# Altium PCB PCB_gen.PcbDoc
Units mm, origin at the board's own origin, x right, y up, seen from the top; angles counter-clockwise.
Board outline 28.17 x 51.31 mm, 2 copper layers (Top Layer, Bottom Layer); 23 components, 24 nets, 92 pads, 1 vias.
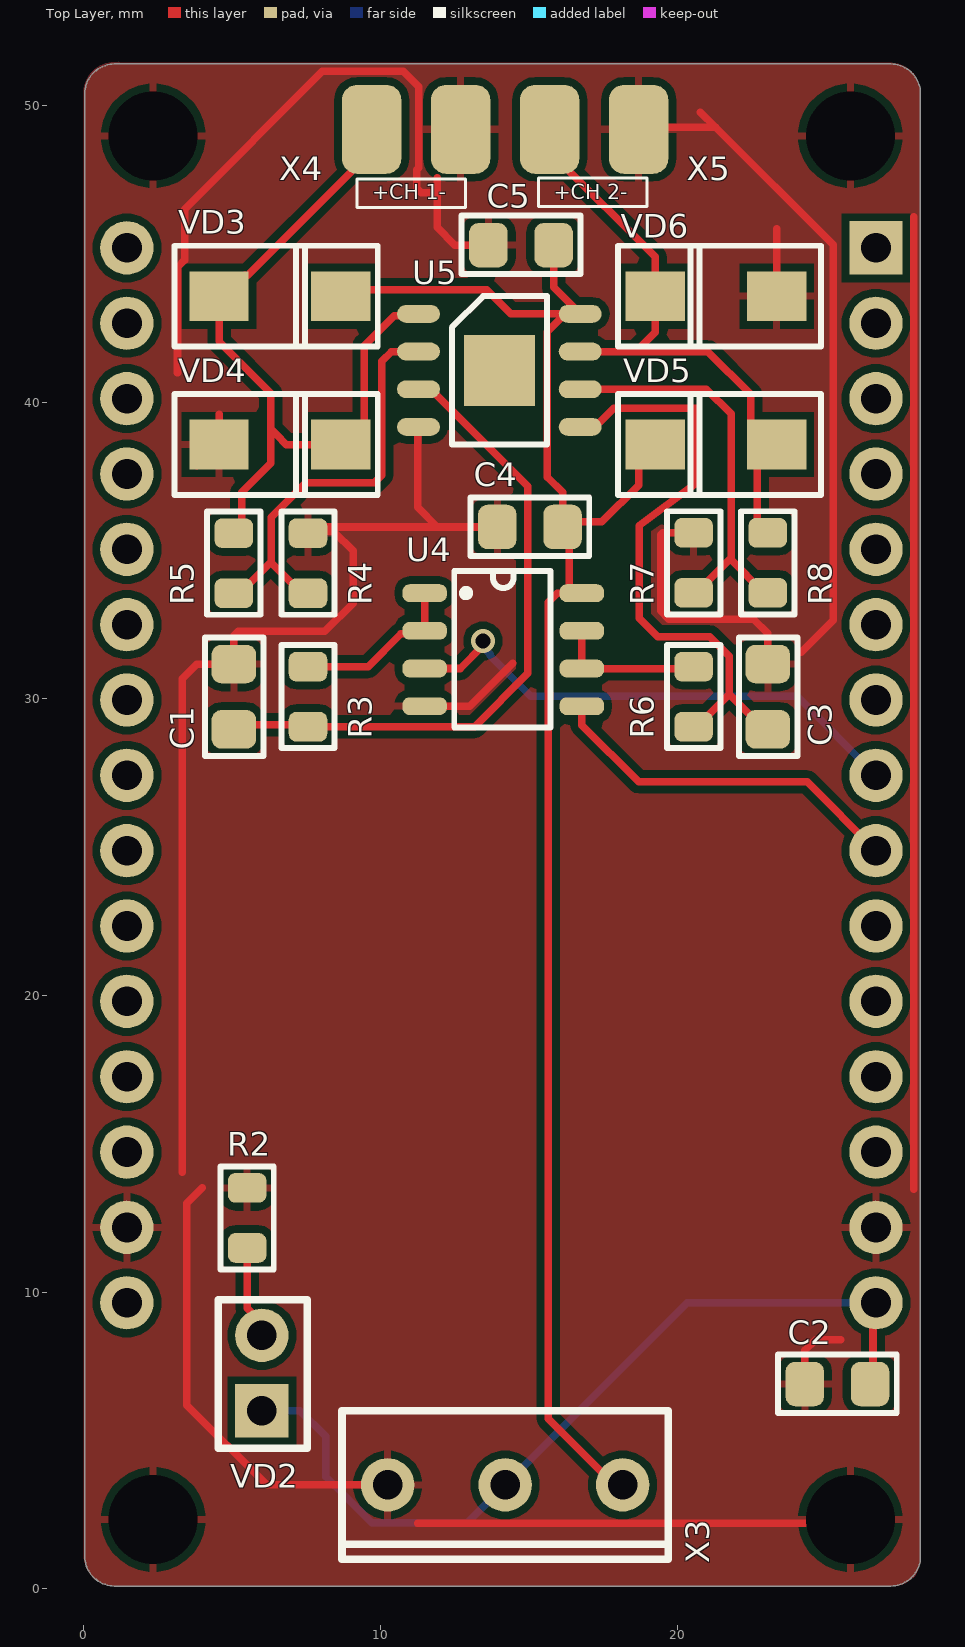
[diagram p0: Top Layer view]
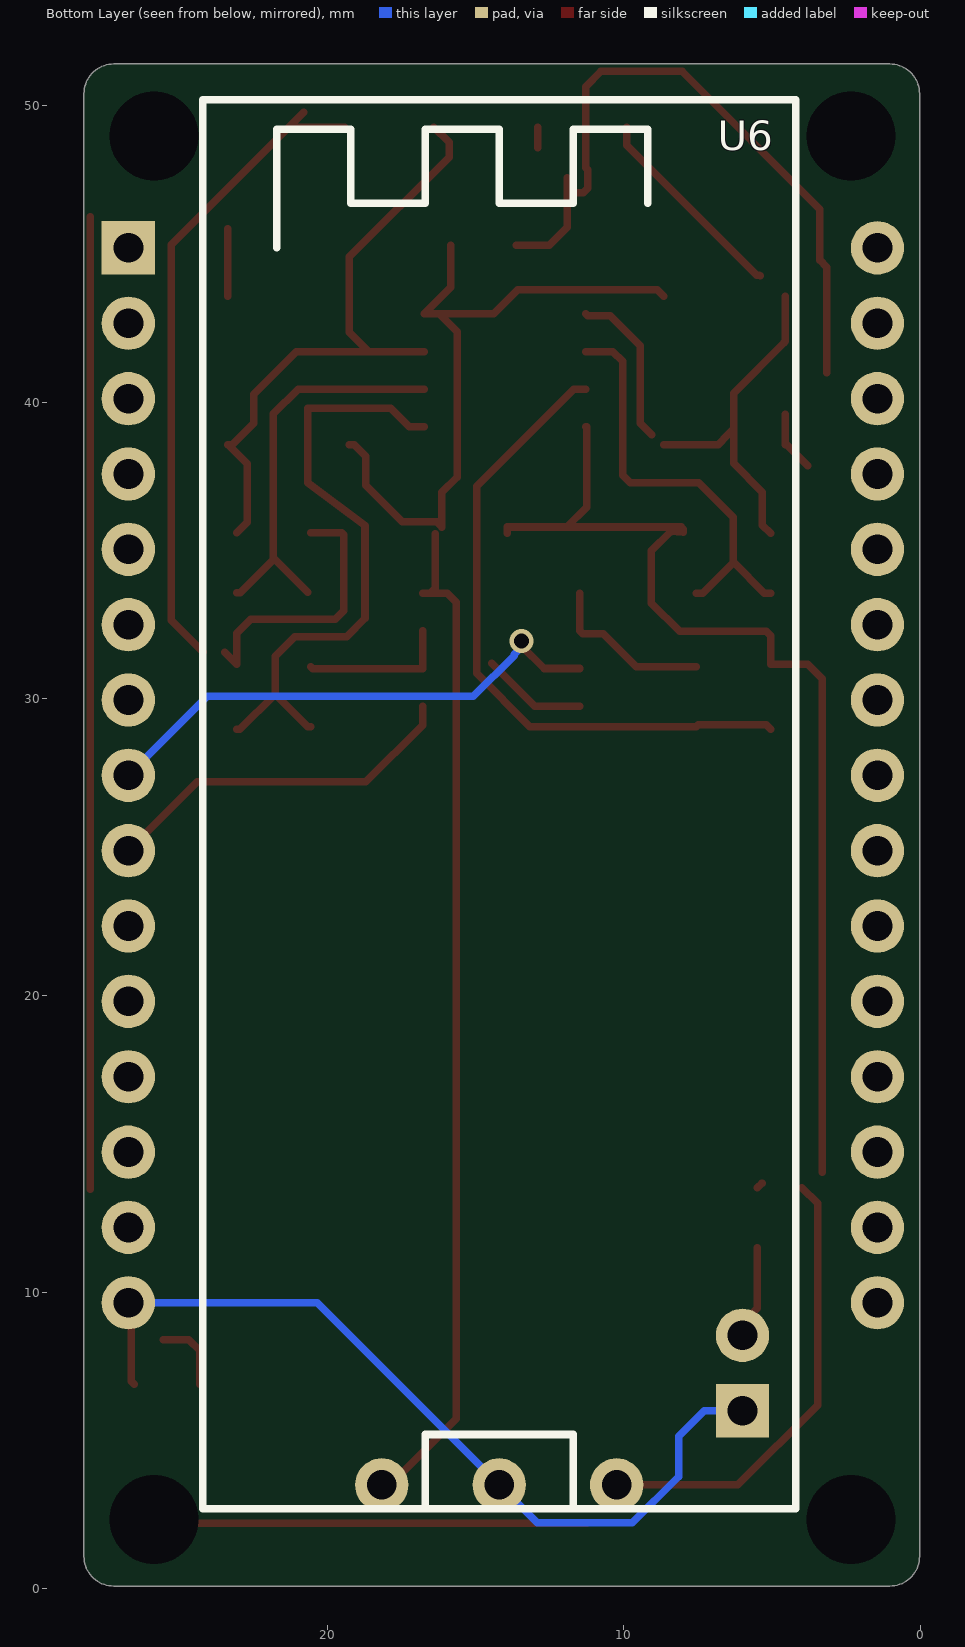
[diagram p1: Bottom Layer view, seen from below]
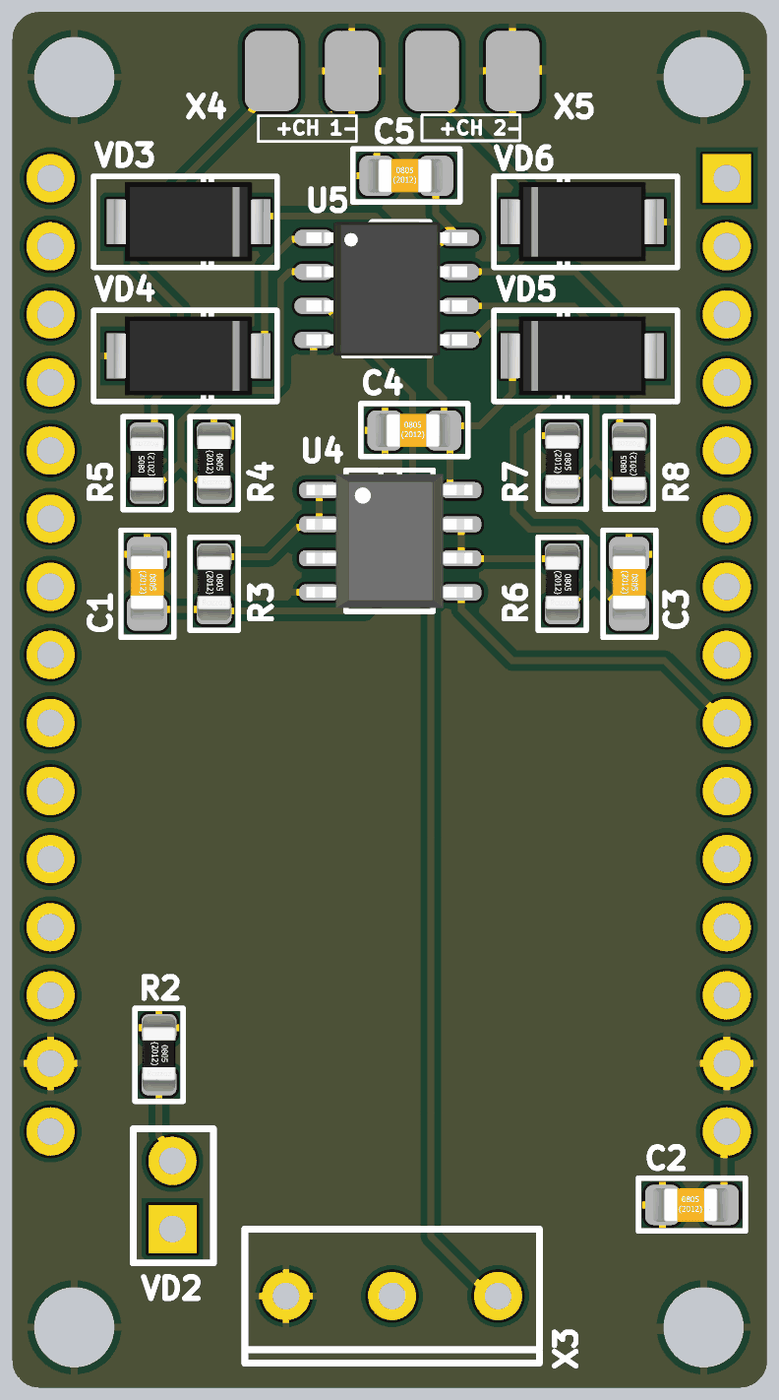
[diagram p2: 3D render of the assembled board from above, using the file's embedded part models]

## Layer stack, top to bottom
Top Solder: solder mask 0.0102, Solder Resist, Dk 3.5
Top Layer: signal copper 0.0356
Dielectric 1: dielectric 0.32, FR-4, Dk 4.8
Bottom Layer: signal copper 0.0356
Bottom Solder: solder mask 0.0102, Solder Resist, Dk 3.5

## Board outline
0.03,1.09 0.03,50.4 cw(c1.03,50.4) 1.03,51.4 27.2,51.4 cw(c27.2,50.4) 28.2,50.4 28.2,1.09 cw(c27.2,1.09) 27.2,0.09 1.03,0.09 cw(c1.03,1.09)

## Design rules (kind name [scope] priority, off if disabled: settings)
Clearance [All] p1: gap=0.254 ignorepadtopadclearanceinfootprint=FALSE except(0: Arc-Hole Track-Hole SMDPad-Hole THPad-Hole Via-Hole Fill-Hole Poly-Hole Region-Hole Text-Hole)
HoleSize [All] p1: absolutevalues=TRUE maxlimit=3 minlimit=0.025 maxpercent=80.000 minpercent=20.000
PolygonConnect [All] p1: connectstyle=Relief reliefconductorwidth=0.254 reliefentries=4 polygonreliefangle="90 Angle" airgapwidth=0.254
RoutingVias [All] p1: holewidth=0.6 width=1 viastyle="Through Hole" minholewidth=0.5 minwidth=0.8 maxholewidth=0.6 maxwidth=3
SolderMaskExpansion [All] p1: expansion=0.102 istentingtop=FALSE
Width [All] p1: maxlimit=0.254 minlimit=0.254 preferedwidth=0.254
29 further rules are at their usual default settings.

## Components (designator, comment, footprint, x,y, rotation, side; value= is the part's Value field where it differs from the comment)
C1 "4.7n" C0805 5.054,30.072 r270 top
C2 "100n" C0805 25.4,6.9 r0 top
C3 "4.7n" C0805 23.054,30.072 r270 top
C4 "100n" C0805 15.034,35.792 r0 top
C5 "100n" C0805 14.734,45.292 r0 top
R2 "510" R0805 5.5,12.5 r270 top
R3 "10k" R0805 7.554,30.072 r270 top
R4 "10k" R0805 7.554,34.572 r270 top
R5 "27k" R0805 5.054,34.572 r90 top
R6 "10k" R0805 20.554,30.072 r270 top
R7 "10k" R0805 20.554,34.585 r270 top
R8 "27k" R0805 23.054,34.585 r90 top
U4 "LM833MX" SO8 11.484,33.562 r270 top
U5 "AD8397ARDZ-REEL7" SOIC-8EP 14.004,41.072 r0 top
U6 "ESP32DevKitV1_30pin" "ESP32 DEVKIT V1_30pin" 26.7,45.2 r90 bottom
VD2 "5003R4D-EPB-P" "2 PIN" 6,6 r90 top
VD3 "US1B" SMA(DO-214AC) 4.754,43.572 r0 top
VD4 "US1B" SMA(DO-214AC) 4.754,38.572 r0 top
VD5 "US1B" SMA(DO-214AC) 23.154,38.572 r180 top
VD6 "US1B" SMA(DO-214AC) 23.154,43.572 r180 top
X3 "VH_3PIN_F" VH_3PIN_F 14.2,3.5 r180 top
X4 "Soldering pads" "Place 2 (3мм,2мм)" 9.7,49.2 r0 top
X5 "Soldering pads" "Place 2 (3мм,2мм)" 15.7,49.2 r0 top

## Footprints (in the part's own frame and the unit in brackets; to place one, negate y for a bottom-side part, rotate by r counter-clockwise, add the part's x,y. Pads: shape width x height; smd on the part's side, far side on the other; paste and mask are expansions set on the pad)
"2 PIN" [mm]
  rect 1.8x1.8 hole 1: 1(0,0)
  round 1.8 hole 1: 2(2.54,0)
  silkscreen extent -1.26,-1.53 3.74,1.47
C0805 [mm]
  rrect50% 1.3x1.5 smd: 1(-1.1,0) 2(1.1,0)
  silkscreen extent -2,-0.97 2,1, body extent -1.45,-0.62 1.35,0.63, height 0.8
"ESP32 DEVKIT V1_30pin" [mm]
  rect 1.8x1.8 hole 1: 1(0,0)
  round 1.8 hole 1: 2(-2.54,0) 3(-5.08,0) 4(-7.62,0) 5(-10.16,0) 6(-12.7,0) 7(-15.24,0) 8(-17.78,0) 9(-20.32,0) 10(-22.86,0) 11(-25.4,0) 12(-27.94,0) 13(-30.48,0) 14(-33.02,0) 15(-35.56,0) 16(-35.56,-25.25) 17(-33.02,-25.25) 18(-30.48,-25.25) 19(-27.94,-25.25) 20(-25.4,-25.25) 21(-22.86,-25.25) 22(-20.32,-25.25) 23(-17.78,-25.25) 24(-15.24,-25.25) 25(-12.7,-25.25) 26(-10.16,-25.25) 27(-7.62,-25.25) 28(-5.08,-25.25) 29(-2.54,-25.25) 30(0,-25.25)
  silkscreen extent -42.5,-22.5 5,-2.5
"Place 2 (3мм,2мм)" [mm]
  rrect50% 2x3 smd: 1(0,0) 2(3,0)
R0805 [mm]
  rrect50% 1x1.3 smd: 1(-1.013,0) 2(1.012,0)
  silkscreen extent -1.74,-0.9 1.74,0.9, body extent -1.44,-0.62 1.36,0.63, height 0.8
SMA(DO-214AC) [mm]
  rect 2x1.68 smd: 1(-0.2,0) 2(3.9,0)
  silkscreen extent -1.7,-1.7 5.15,1.7, body extent -0.95,-1.47 4.65,1.48, height 2.7
SO8 [mm]
  rrect80% 0.6x1.5 smd: 1(0,0) 2(1.27,0) 3(2.54,0) 4(3.81,0) 5(3.81,5.3) 6(2.54,5.3) 7(1.27,5.3) 8(0,5.3)
  silkscreen extent -0.75,1 4.52,4.25, body extent -0.6,-0.48 4.4,5.72, height 1.75
SOIC-8EP [mm] "SOIC, 8-Leads, Body 4.90x3.90mm, Pitch 1.27mm, Thermal Pad 2.39x2.39mm, IPC Medium Density"
  rect 2.39x2.39 smd: 0(0,0)
  oval 1.45x0.6 smd: 1(-2.725,1.905) 2(-2.725,0.635) 3(-2.725,-0.635) 4(-2.725,-1.905) 5(2.725,-1.905) 6(2.725,-0.635) 7(2.725,0.635) 8(2.725,1.905)
  silkscreen extent -1.6,-2.5 1.6,2.5, body extent -3,-2.5 3,2.5, height 1.65
VH_3PIN_F [mm]
  round 1.8 hole 1: 1(-3.96,0) 2(0,0) 3(3.96,0)
  silkscreen extent -5.5,-2.5 5.5,2.5

## Part data
C1 C3: library part Capacitor, "MLCC S0R 50V"
C2 C4 C5: library part Capacitor, "MLCC 50V"
R2 R3 R4 R5 R6 R7 R8: library part Resistor
U4 U5: library part "IC_OpAmp_LM358 (Dual)"
U6: library part MOD_ESP32DevKitV1_30pin
VD2: library part "Diode (LED)"
VD3 VD4 VD5 VD6: library part Diode
X3: library part "Terminal block (3-pin)"
X4 X5: library part "Terminal block (2-pin)"

## Free pads (board coordinates)
  round 0 hole 3 unplated: 0(2.335,2.334) 0(2.335,48.975) 0(25.835,2.334) 0(25.835,48.975)

## Via types
v1: diameter 0.8, hole 0.5, Top Layer to Bottom Layer, 1 vias

## Nets (pads, with @x,y where several pads share a name; then routed paths per layer and width w, separated by ;. In a path a pad name is that pad's centre, name@x,y a point inside that pad or via, vN(x,y) a via of type N, cw(c..) or ccw(c..) an arc to the next point about the centre after c; other vN are vias at no path point)
+5V: C2.2 U6.15 VD2.1 X3.2 | length 29
  Top Layer w0.254: C2.2 26.6,7 26.6,9.54 U6.15
  Bottom Layer w0.254: VD2.1 7.281,6 8.144,5.137 8.144,3.784 9.709,2.219 12.919,2.219 X3.2 20.34,9.64 U6.15
+15V: C4.2 C5.2 U4.8 U5.8 VD3.2 VD5.2 X3.1 | length 57.9
  Top Layer w0.254: VD3.2 8.866,43.784 13.574,43.784 14.381,42.977 16.134,42.977 U5.8 15.834,43.872 C5.2 ; U5.8@16.151,42.909 15.623,42.382 15.623,37.477 16.134,36.966 C4.2 16.305,35.963 17.463,35.963 18.7,37.2 18.7,38.178 19.094,38.572 VD5.2 ; C4.2@16.362,35.564 16.362,33.726 U4.8@16.527,33.562 ; U4.8 U4.8@16.527,33.562 ; X3.1 17.877,3.5 15.651,5.726 15.651,33.257 15.956,33.562 U4.8@16.527,33.562
GND: 
GNDD: C1.1 C2.1 C3.1 C4.1 C5.1 pad.0 R2.1 R4.1 R7.1 U4.4 U5.4 U6.14 U6.17 VD4.1 VD6.1 X3.3 X4.2 X5.2 | length 167.4
  Top Layer w0.254: 3.154,40.992 3.154,44.551 3.396,44.793 3.396,46.51 8.039,51.153 10.769,51.153 11.285,50.637 11.285,47.907 11.216,47.838 11.216,47.214 11.365,47.065 11.755,47.065 11.904,47.214 ; 3.307,14.037 3.307,30.655 ; 3.307,30.68 3.799,31.172 C1.1 5.054,32.121 5.203,32.27 8.122,32.27 9.073,33.22 9.073,34.986 8.443,35.615 ; VD4.1@3.799,37.859 4.512,38.572 VD4.1 4.554,39.593 ; 3.994,13.513 3.469,12.987 3.469,6.192 6.161,3.5 X3.3 ; R2.1@5.342,13.671 R2.1 ; 8.442,35.641 7.998,35.613 7.998,35.722 8.068,35.792 11.918,35.792 ; 11.251,2.207 25.363,2.207 26.404,3.248 ; U5.4 11.257,39.167 11.257,36.453 11.918,35.792 ; U4.4 13.002,29.752 14.45,31.2 ; 11.904,47.57 11.904,47.214 ; X4.2@12.904,48.57 X4.2@12.904,49.272 ; C5.1 12.508,45.292 11.904,45.896 11.904,47.214 ; C4.1@13.934,35.585 C4.1 11.918,35.792 ; X5.2@19.404,49.272 19.928,49.272 21.291,49.272 ; R7.1 19.512,35.597 19.441,35.526 19.441,32.966 19.72,32.687 22.571,32.687 23.054,32.204 C3.1 C3.1@23.455,31.573 ; 20.782,49.781 21.291,49.272 ; VD6.1 23.354,45.846 ; 24.181,31.573 25.252,32.644 25.252,45.31 21.291,49.272 ; C2.1 24.3,8.031 24.669,8.4 25.52,8.4 ; 27.981,13.461 27.981,46.258
NetBT1_1: 
NetBT1_2: 
NetC1_2: C1.2 R3.2 U5.3 | length 22.1
  Top Layer w0.254: C1.2 5.204,29.122 7.491,29.122 R3.2 13.167,29.06 14.965,30.858 14.965,37.164 11.693,40.437 U5.3
NetC3_2: C3.2 R6.2 U5.5 | length 20.5
  Top Layer w0.254: U5.5 17.229,39.167 17.861,39.799 20.655,39.799 20.655,37.284 18.725,35.836 18.725,32.712 19.338,32.099 21.091,32.099 21.752,31.437 21.752,30.16 ; R6.2 20.651,29.06 21.752,30.16 ; C3.2 22.941,28.972 21.752,30.16
NetR1_2: 
NetR2_2: R2.2 VD2.2 | length 3.2
  Top Layer w0.254: R2.2 5.5,9.458 6,8.958 VD2.2
NetR3_1: R3.1 U4.1 U4.2 | length 5.7
  Top Layer w0.254: R3.1 9.585,31.085 10.689,32.189 11.381,32.189 U4.2 U4.1
NetR4_2: R4.2 R5.1 U5.2 | length 14.4
  Top Layer w0.254: R5.1 5.26,33.56 6.3,34.6 7.34,33.56 R4.2 ; 6.314,34.6 6.314,36.125 7.472,37.284 9.784,37.284 10.038,37.538 10.038,41.377 10.368,41.707 U5.2
NetR5_2: R5.2 U5.1 VD3.1 VD4.2 X4.1 | length 24.2
  Top Layer w0.254: VD3.1 4.554,42.046 4.6,42 6.3,40.3 6.3,39.1 ; R5.2 5.327,35.858 5.327,36.966 6.3,37.939 6.3,39.093 ; VD3.1@5.4,44.258 5.427,44.285 5.526,44.285 9.904,48.663 X4.1@9.904,49.272 ; 6.293,39.1 6.493,38.9 6.821,38.572 VD4.2 ; VD4.2@9.059,38.9 9.444,39.285 9.444,41.909 10.456,42.92 11.223,42.92 U5.1
NetR6_1: R6.1 U4.6 U4.7 | length 5.1
  Top Layer w0.254: U4.6 U4.7 ; U4.6@16.797,31.009 20.479,31.009 R6.1
NetR7_2: R7.2 R8.1 U5.6 | length 13.6
  Top Layer w0.254: U5.6 20.982,40.437 21.814,39.605 21.814,34.774 ; R7.2@20.653,33.588 21.814,34.749 ; 21.781,34.715 22.924,33.572 R8.1
NetR8_2: R8.2 U5.7 VD5.1 VD6.2 X5.1 | length 21.3
  Top Layer w0.254: X5.1@16.404,49.272 15.891,48.759 15.891,48.259 19.254,44.896 VD6.2 19.254,42.364 18.597,41.707 ; U5.7 18.597,41.707 ; R8.2 22.7,35.951 22.7,37.918 23.274,38.492 VD5.1 23.194,38.572 22.481,39.285 22.481,40.262 21.036,41.707 18.597,41.707
NetSW1_1: 
NetSW1_2: 
NetU1_1: 
NetU1_2: 
NetU2_4: 
NetU3_4: 
NetU4_3: U4.3 U6.8 | length 17.7
  Top Layer w0.254: U4.3 12.689,31.022 13.45,31.783 v1(13.45,31.95)
  Bottom Layer w0.254: v1(13.45,31.95) 13.45,31.748 13.694,31.504 13.694,31.456 15.069,30.081 24.039,30.081 U6.8
NetU4_5: U4.5 U6.9 | length 12.3
  Top Layer w0.254: U4.5 16.784,29.116 18.7,27.2 24.38,27.2 U6.9
pads on no net: U5.0 U6.1 U6.2 U6.3 U6.4 U6.5 U6.6 U6.7 U6.10 U6.11 U6.12 U6.13 U6.16 U6.18 U6.19 U6.20 U6.21 U6.22 U6.23 U6.24 U6.25 U6.26 U6.27 U6.28 U6.29 U6.30

## Polygon pours and split planes (outlines as drawn)
GNDD on Top Layer "NONET_L-01_P-001" (solid, remove dead copper, pour order 3): 1.258,51.45 27.15,51.45 cw(c27.15,50.4) 28.2,50.4 28.2,1 cw(c27.3,1) 27.3,0.1 1.02,0.1 cw(c1.02,1.12) 0,1.12 0,50.589 cw(c1.059,50.391)

## Silkscreen, mask and mechanical layers (free items; w line width, h text height)
Top Overlay:
  lines w0.1: 9.207,46.568 12.867,46.568 12.867,47.527 9.207,47.527 9.207,46.568 ; 15.318,46.6 18.978,46.6 18.978,47.558 15.318,47.558 15.318,46.6
  text "+CH 1-" at 9.724,46.838 h0.5
  text "+CH 2-" at 15.842,46.838 h0.5
Mechanical 1:
  the board outline again, w0.254